# Altium PCB 朝外差接收头.PcbDoc
Units mil, origin at the board's own origin, x right, y up, seen from the top; angles counter-clockwise.
Board outline 1173.75 x 565.83 mil, 2 copper layers (Top Layer, Bottom Layer); 42 components, 26 nets, 116 pads, 44 vias.
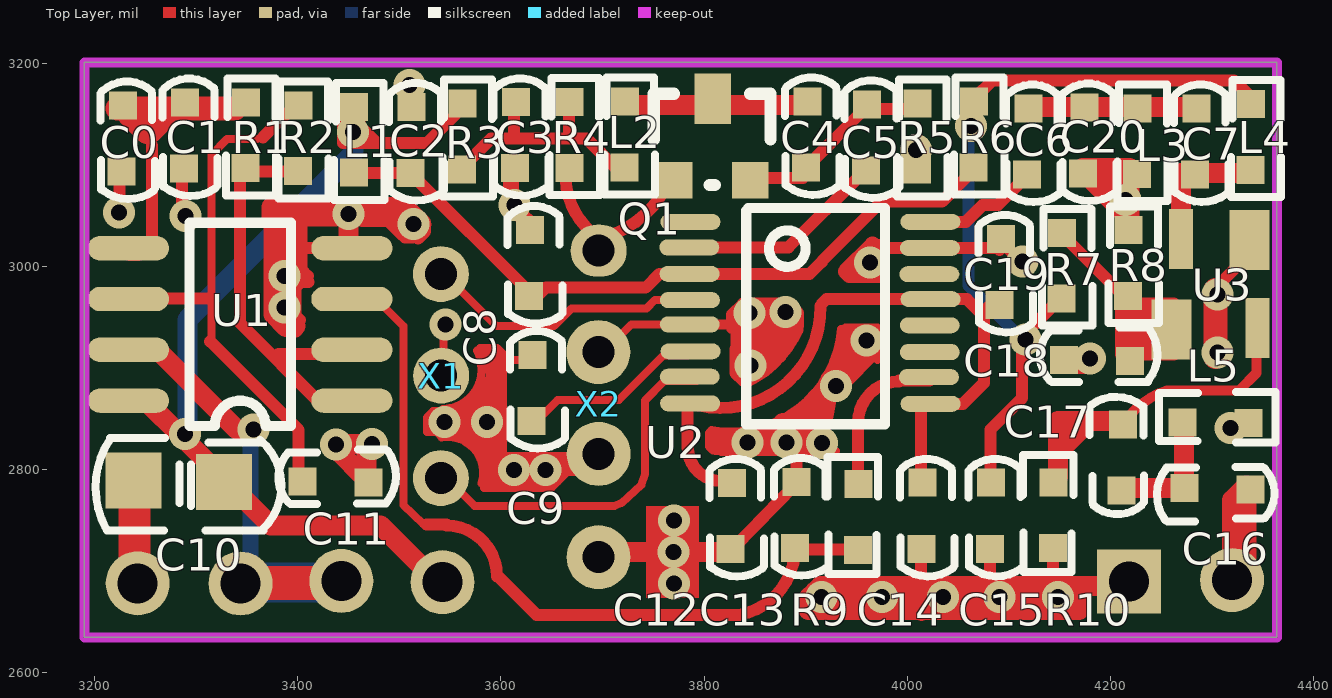
[diagram p0: Top Layer view]
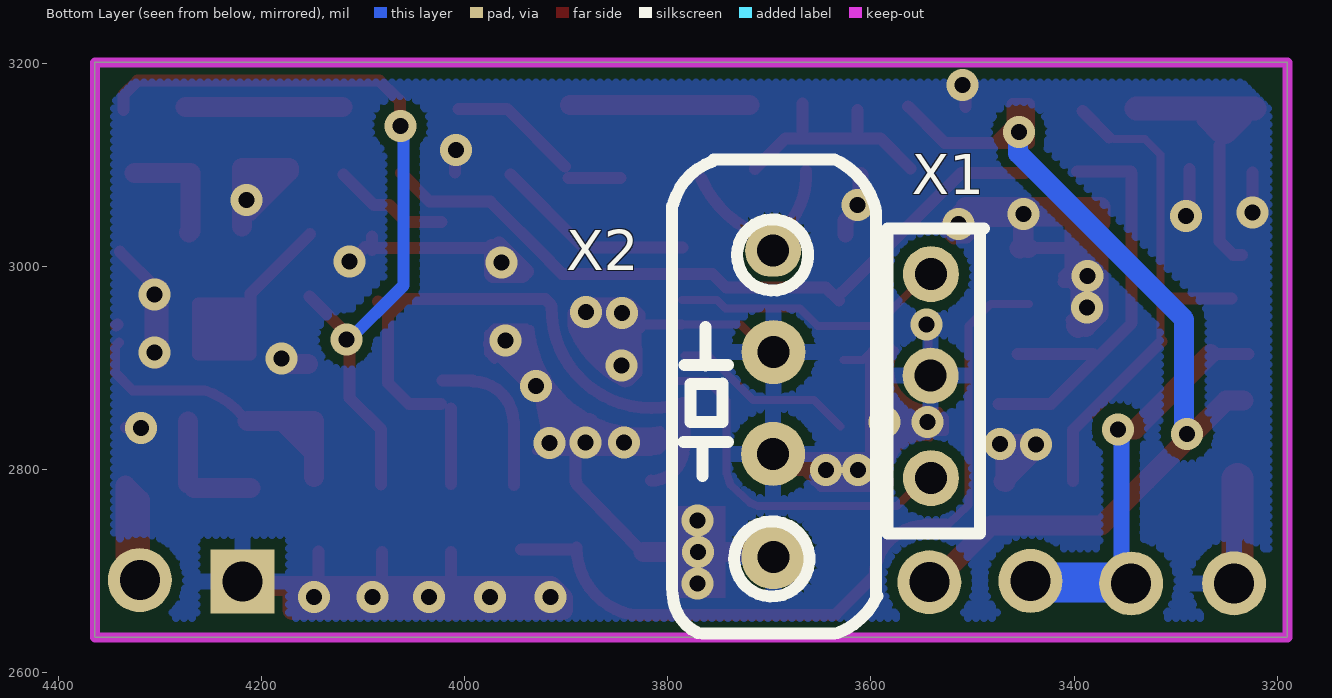
[diagram p1: Bottom Layer view, seen from below]

## Layer stack, top to bottom
Top Solder: solder mask 0.4, Solder Resist, Dk 3.5
Top Layer: signal copper 1.4
Dielectric 1: dielectric 12.6, FR-4, Dk 4.8
Bottom Layer: signal copper 1.4
Bottom Solder: solder mask 0.4, Solder Resist, Dk 3.5

## Board outline
3190,2635 3190,3200.83 4363.75,3200.83 4363.75,2635

## Design rules (kind name [scope] priority, off if disabled: settings)
Clearance [All] p1: gap=10 ignorepadtopadclearanceinfootprint=FALSE except(0: Arc-Hole Track-Hole SMDPad-Hole THPad-Hole Via-Hole Fill-Hole Poly-Hole Region-Hole Text-Hole)
PolygonConnect [All] p1: connectstyle=Relief reliefconductorwidth=10 reliefentries=4 polygonreliefangle="90 Angle" airgapwidth=10
RoutingVias [All] p1: holewidth=28 width=50 viastyle="Through Hole" minholewidth=28 minwidth=50 maxholewidth=28 maxwidth=50
SolderMaskExpansion [All] p1: expansion=4
Width [All] p1: maxlimit=200 minlimit=10 preferedwidth=10 minimp=50.000000 maximp=50.000000 favimp=50.000000
30 further rules are at their usual default settings.

## Components (designator, comment, footprint, x,y, rotation, side; value= is the part's Value field where it differs from the comment)
C0 "" C1 3232.5,3154.17 r0 top
C1 "" C1 3293.75,3157.08 r0 top
C2 "" C1 3516.67,3152.75 r0 top
C3 "" C1 3619.58,3157.5 r0 top
C4 "" C1 3906.25,3158.33 r0 top
C5 "" C1 3965,3155.42 r0 top
C6 "" C1 4123.75,3151.17 r0 top
C7 "" C1 4289.17,3151.42 r0 top
C8 "" C1 3633.33,3031.67 r0 top
C9 "" C1 3635.83,2908.75 r0 top
C10 "" C0805 3250.83,2795.25 r0 top
C11 "" C1 3408.75,2792.92 r90 top
C12 "" C1 3831.88,2782.71 r0 top
C13 "" C1 3895.42,2783.75 r0 top
C14 "" C1 4019.58,2782.92 r0 top
C15 "" C1 4087.08,2782.92 r0 top
C16 "" C1 4333.54,2776.04 r270 top
C17 "" C1 4206.25,2783.75 r180 top
C18 "" C1 4158.33,2912.71 r90 top
C19 "" C1 4096.67,3023 r0 top
C20 "" C1 4178.75,3152.17 r0 top
L1 "" R0603 3458.75,3156.83 r0 top
L2 "" R0603 3725,3162.08 r0 top
L3 "" R0603 4229.58,3155.42 r0 top
L4 "" R0603 4341.25,3159.58 r0 top
L5 "" R0603 4271.25,2849.58 r90 top
Q1 "" SOT-23 3770.42,3085 r0 top
R1 "" R0603 3352.08,3161.25 r0 top
R2 "" R0603 3403.75,3158.33 r0 top
R3 "" R0603 3565.42,3160 r0 top
R4 "" R0603 3670.83,3161.67 r0 top
R5 "" R0603 4012.92,3160 r0 top
R6 "" R0603 4068.75,3162.08 r0 top
R7 "" R0603 4155.42,3032.92 r0 top
R8 "" R0603 4220.83,3035.42 r0 top
R9 "" R0603 3948.33,2721.25 r180 top
R10 "" R0603 4140.42,2722.92 r180 top
U1 "" SO-8 3453.33,2867.92 r180 top
U2 "" U0 3787.92,3041.25 r0 top
U3 "" U2 4337.5,3017.5 r0 top
X1 "" X0 3544.17,2988.75 r0 top
X2 "" X2 3701.67,3008.75 r0 top

## Footprints (in the part's own frame and the unit in brackets; to place one, negate y for a bottom-side part, rotate by r counter-clockwise, add the part's x,y. Pads: shape width x height; smd on the part's side, far side on the other; paste and mask are expansions set on the pad)
C1 [mm]
  rect 0.7x0.7 smd: 1(-0.148,-1.545) 2(-0.116,0.106)
  silkscreen extent -0.68,-2.23 0.69,0.7
C0805 [mm]
  rect 1.4x1.4 smd: 4(-0.323,-0.153) 5(1.947,-0.185)
  silkscreen extent -1.26,-1.4 3.38,0.91
R0603 [mm]
  rect 0.7x0.7 smd: 1(-0.079,0.005) 2(-0.09,-1.64)
  silkscreen extent -0.58,-2.32 0.68,0.6
SO-8 [mil]
  oval 80x24 smd: 1(0,0) 2(0,-50) 3(0,-100) 4(0,-150) 5(220,-150) 6(220,-100) 7(220,-50) 8(220,0)
  silkscreen extent 60,-175 160,25
SOT-23 [mil]
  rect 36x36 smd: 1(0,0) 2(75,0)
  rect 36x50 smd: 3(38,80)
  silkscreen extent -20,-5 95,85
U0 [mm]
  oval 1.5x0.4 smd: 1(-0.037,0.064) 2(-0.064,-0.572) 3(-0.058,-1.233) 4(-0.048,-1.889) 5(-0.053,-2.498) 6(-0.032,-3.17) 7(-0.053,-3.805) 8(-0.042,-4.471) 9(5.969,-4.482) 10(5.927,-3.815) 11(5.948,-3.191) 12(5.948,-2.519) 13(5.969,-1.868) 14(5.937,-1.244) 15(5.953,-0.587) 16(5.964,0.069)
  silkscreen extent 1.36,-5 4.83,0.41
U2 [mm]
  rect 1x1.5 smd: 7(-1.968,-2.021) 7(-0.021,0.212)
  rect 0.6x1.5 smd: 8(-1.725,0.243) 9(0.18,-1.99)
X0 [mm]
  round 1.4 hole 0.8: 9(-0.085,0.095) 10(-0.074,-2.445) 11(-0.085,-5.006)
X2 [mm]
  round 1.6 hole 0.8: 8(-0.143,-7.493) 9(-0.138,-4.911) 10(-0.148,-2.365)
  oval 1.4x1.3 hole 0.8: 11(-0.138,0.169)

## Free pads (board coordinates)
  rect 62.99x62.99 hole 39.37: 1(4218.33,2690)
  round 62.99 hole 39.37: 2(4319.58,2691.25) 3(3542.5,2689.17) 4(3442.92,2690.42) 5(3343.75,2687.92) 6(3242.5,2688.12)

## Via types
v1: diameter 31.5, hole 15.75, Top Layer to Bottom Layer, 44 vias

## Nets (pads, with @x,y where several pads share a name; then routed paths per layer and width w, separated by ;. In a path a pad name is that pad's centre, name@x,y a point inside that pad or via, vN(x,y) a via of type N, cw(c..) or ccw(c..) an arc to the next point about the centre after c; other vN are vias at no path point)
GND: C0.1 C1.1 C2.2 C3.1 C8.2 C9.2 C10.4 C11.1 C12.1 C13.2 C14.1 C15.1 C18.2 C19.2 C20.1 L3.2 L5.2 pad.1 pad.6 R5.2 R8.1 R10.1 U1.4 U2.5 U2.15 U3.7@4336.67,3025.83 X1.10 X2.8 X2.9 X2.10 | length 5957
  Top Layer w7.87: v1@3540.42,2857.5 3533.12,2857.5 3527.08,2851.46 3527.08,2837.08 3537.08,2837.08 v1@3541.04,2833.12 ; v1@3541.62,2831.56 cw(c3547.59,2797.08) 3580.97,2786.54 ; v1@3543.1,2859.73 ccw(c3542,2898.71) 3576.43,2917.04 ; X1.10@3543.33,2896.67 v1@3543.33,2943.54 ; 3579.58,2919.79 3596.04,2919.79 3607.92,2907.92 C9.2@3626.88,2907.92 ; 3583.12,2782.08 3649.79,2782.08 3655.73,2788.02 3665.21,2797.5 X2.9@3682.92,2797.5 ; 3601.88,2912.71 3601.88,2813.54 X2.9@3681.88,2813.54 ; X2.10@3706.25,2920.83 3728.33,2942.92 U2.5 ; 3806.25,2837.71 3804.58,2836.04 3804.58,2822.71 3808.54,2818.75 ; 3807.19,2838.95 ccw(c3825.17,2947.47) 3934.79,2938.39 ; 3811.25,2818.33 3884.5,2818.33 3889.58,2818.33 v1@3929.58,2818.33 ; 3939.17,2940 3970.42,2940 3976.67,2933.75 3976.67,2914.17 3970.42,2907.92
  Top Layer w10: 3374.17,3028.04 3374.17,3030 ; v1(3386.88,2990.42) 3386.88,3010.62 3389.79,3013.54 3389.79,3019.38 ; 3397.29,3035.42 3389.79,3035.42 ; U2.5 3827.5,2942.92 3833.54,2942.92 3830.83,2940.21 3830.83,2937.5 3830.83,2936.88 3830.83,2920.51 3831.84,2919.51 ; 3841.08,2926.63 3838.96,2926.63 3831.84,2919.51 ; v1(3845.42,2902.71) v1@3845.42,2905.92 ; 3374.17,3030 3376.13,3031.96 3377.29,3033.12 3387.08,3033.12 3389.38,3035.42 ; 3374.17,3030 3376.13,3028.04 ; 3374.17,3030 3374.17,3039.17 ; 3374.17,3039.17 3376.13,3037.21 3377.92,3035.42 3389.38,3035.42 ; 3374.17,3039.17 3376.13,3039.17 3389.79,3039.17 ; 3374.17,3039.17 3374.17,3043.96 3382.92,3043.96 3389.79,3050.83 3389.79,3039.17 ; 3376.13,3028.04 3384.79,3019.38 3389.79,3019.38 ; 3376.13,3028.04 3389.15,3028.04 3389.79,3028.69 ; 3389.38,3035.42 3389.79,3035.42 ; 3389.38,3035.42 3389.79,3035.83 ; 3389.79,3019.38 3389.79,3028.69 ; 3389.79,3028.69 3389.79,3035.42 ; 3389.79,3035.42 3389.79,3035.83 ; 3389.79,3035.83 3389.79,3039.17 ; 3831.84,2919.51 3831.08,2918.75 3832.59,2918.75 ; 3831.84,2919.51 3832.59,2918.75 ; 3832.59,2918.75 3844.38,2918.75 3845.42,2917.71 3845.42,2915.62 v1@3845.42,2905.92 ; 3832.59,2918.75 3840.57,2910.77 v1@3845.42,2905.92
  Top Layer w11.81: v1@3224.58,3047.5 C0.1@3224.58,3092.5 ; v1@3286.25,3048.33 C1.1@3286.25,3095.83 ; v1@3389.79,2953.12 3389.79,3013.54 ; v1@3397.29,2989.17 3397.29,3035.42 3397.29,3051.88 ; 3397.92,3045.42 3403.75,3045.42 ; 3402.29,2947.08 3397.71,2951.67 3397.71,2978.96 3403.54,2984.79 3410.42,2984.79 ; 3402.92,3046.46 3403.75,3046.46 ; 3407.5,3017.92 U1.4@3445.6,3017.92 ; 3410,2990.42 3403.75,2996.67 3403.75,3045.42 ; v1@3437.5,3045.42 3403.75,3045.42 ; v1@3453.12,3046.46 3450,3046.46 3403.75,3046.46 ; v1@3463.12,3044.58 3489.37,3044.58 ; v1@3502.92,3044.58 3489.37,3044.58 ; v1@3503.12,3046.88 v1@3514.38,3035.62 ; C2.2@3506.67,3156.67 v1@3506.67,3182.92 ; 3508.75,3057.92 v1@3525.21,3041.46 ; 3510.21,3058.96 3525.21,3043.96 v1@3525.21,3041.46 ; v1@3518.33,3027.5 3525.21,3034.38 v1@3525.21,3040.62 ; 3811.67,2823.12 3811.67,2832.71 ; 3827.5,2939.17 3827.5,2942.92 3827.5,2952.5 3838.33,2963.33 3883.33,2963.33 3885.94,2960.73 3892.5,2954.17 3892.5,2941.25 ; C12.1@3829.58,2723.75 3889.88,2785.68 C13.2@3889.55,2787.7 ; 3830,2937.71 3830.21,2937.5 ; 3830.83,2918.75 3830.83,2895 3838.33,2887.5 ; v1@3834.79,2945.62 v1@3884.79,2945.62 ; v1@3836.04,2952.08 v1@3883.33,2952.08 ; v1@3837.5,2907.71 3840.57,2910.77 3845.42,2915.62 3854.38,2924.58 ; v1@3838.75,2895.83 3845.52,2902.6 v1@3885.83,2942.92 ; 3841.88,2937.08 3854.38,2924.58 ; 3841.97,2886.48 ccw(c3796.99,2980.26) 3891.85,2937.61 ; 3847.71,2920 3841.08,2926.63 3830.83,2936.88 3830.21,2937.5 ; v1@3849.17,2895.83 3879.17,2925.83 ; 3854.58,2924.38 3854.38,2924.58 ; 3857.08,2937.5 3830.83,2937.5 3830.21,2937.5 ; 3869.17,2939.38 3854.38,2924.58 ; v1(3881.04,2826.88) v1@3883.49,2824.42 ; v1@3884.5,2818.33 v1@3883.49,2824.42 ; C13.2 3890.83,2817.08 3889.58,2818.33 v1@3883.49,2824.42 ; v1@3960.42,2929.17 3959.05,2927.25 3927.73,2883.41 3927.08,2882.5 3916.44,2826.01 3916.25,2825 3916.19,2825 v1@3883.09,2826.9 ; v1@3971.25,3013.33 v1@3972.71,3013.33 ; 3972.71,3018.96 3973.75,3017.92 4090.83,3017.92 C19.2@4090.83,3016.25 ; R5.2@4009.17,3092.5 v1@4009.17,3118.33 ; 4013.33,2685.42 C14.1@4013.33,2718.75 ; 4014.17,2657.08 4014.17,2661.67 4014.17,2674.58 4014.17,2685.42 ; v1@4080,2670.42 4080,2674.58 v1@4080,2685.42 ; v1@4081.25,2685.42 C15.1@4081.25,2718.75 ; C19.2@4090.83,3029.58 4090.83,3018.96 4097.71,3018.96 v1@4115.83,3000.83 ; v1@4140,2662.92 4140,2674.58 v1@4140,2685.42 ; v1@4143.54,2685.42 R10.1@4143.54,2719.58 ; v1@4301.67,2977.08 U3.7@4339.17,3014.58 ; v1@4314.17,2841.25 L5.2@4333.33,2841.25 ; 3403.75,3045.42 3403.75,3046.46 ; 3489.37,3044.58 3503.02,3030.94 3505.42,3028.54 3513.12,3028.54 v1@3525.21,3040.62 ; v1@3525.21,3040.62 v1@3525.21,3041.46 ; v1@3525.21,3040.62 3525.62,3041.04 v1@3525.21,3041.46 ; v1@3883.09,2826.9 3881.05,2827.01 3843.33,2829.17 3881.08,2827.98 3882.92,2827.92 3883.03,2827.2 v1@3883.09,2826.9 ; v1@3883.09,2826.9 v1@3883.49,2824.42
  Top Layer w15.75: C3.1@3610,3090 3610,3060 3625,3045 C8.2@3625,3031.25 ; v1@3952.29,2998.33 3960.62,3006.67 v1@3967.5,3013.54 ; v1@3962.71,2995.62 v1@3966.67,2999.58 ; 3965.83,3021.46 3939.58,2995.21 3943.3,2991.49 3971.9,2991.49 3972.71,2992.29 v1@3972.71,3013.33 ; 3970.21,3018.96 3972.71,3018.96
  Top Layer w19.68: 3388.33,2940.42 3376.13,2952.62 3376.13,3028.04 3376.13,3031.96 3376.13,3037.21 3376.13,3039.17 3376.13,3042 3374.17,3043.96 3374.17,3058.33 3507.08,3058.33 ; 3396.25,2939.58 3397.92,2941.25 ; v1@3435,2825.42 3467.5,2825.42 C11.1@3467.5,2790.42 ; v1@3437.08,2820.83 C11.1@3467.5,2790.42 ; U1.4@3445,3018.12 U1.4@3445.6,3017.92 ; v1@3456.62,3049.19 3457.67,3052 v1@3457.5,3055.83 ; C11.1@3467.5,2787.92 C11.1@3467.5,2790.42 ; C11.1@3469.58,2788.33 C11.1@3467.5,2790.42 ; v1@3537.29,2847.5 v1@3575.62,2847.5 ; v1@3543.33,2841.67 3565.62,2841.67 ; 3560,2857.08 v1@3575.62,2857.08 ; 3575.62,2831.46 v1@3575.62,2847.5 ; 3575.62,2868.54 v1@3575.62,2857.08 ; v1@3578.75,2857.08 v1@3575.62,2857.08 ; v1@3580.21,2847.5 v1@3575.62,2847.5 ; 3585,2815.83 3585,2881.25 ; 3585.83,2909.38 3585.83,2913.75 ; 3591.25,2792.71 v1@3650.62,2792.71 ; 3594.79,2912.92 3594.79,2805 X2.9@3671.46,2805 ; X2.8@3704.17,2718.75 v1(3770,2718.75) C12.1@3823.75,2718.75 ; v1@3855,2833.33 v1@3893.75,2833.33 ; 3877.5,2845.83 3896.25,2845.83 ; 3892.71,2849.17 3916.67,2873.12 ; v1@3923.96,2888.33 3944.58,2908.96 ; v1@3925.83,2674.58 v1(3975,2674.58) 4014.17,2674.58 v1(4035,2674.58) 4080,2674.58 v1(4090.62,2674.58) 4140,2674.58 v1(4148.12,2674.58) 4165.83,2674.58 ; v1@3928.54,2880.42 v1@3971.67,2923.54 ; 3939.38,2911.67 3939.38,2922.29 ; 3941.67,2931.46 v1@3966.88,2931.46 ; 3945.62,2917.29 v1@3953.54,2925.21 ; C18.2@4154.17,2904.17 v1@4175,2904.17 ; 4169.17,2676.67 4169.17,2661.67 4014.17,2661.67 3902.92,2661.67 3902.92,2673.75 3908.75,2679.58 3909.58,2680.42 3914.58,2685.42 4014.17,2685.42 4080,2685.42 4140,2685.42 pad.1@4210,2685.42 ; C20.1@4172.5,3096.67 4218.75,3096.67 R8.1@4218.75,3039.17 ; C20.1@4172.92,3093.33 v1@4212.08,3054.17 ; 4197.92,3087.5 v1@4211.25,3074.17 ; v1@3575.62,2847.5 v1@3575.62,2857.08
  Top Layer w20: v1(3450,3051.67) 3450,3046.46 3450,3021.25 U1.4
  Top Layer w23.62: v1@4303.33,2910.83 v1@4303.33,2976.67
  Top Layer w31.5: pad.6@3239.17,2697.08 C10.4@3239.17,2790.83
  other v1: 3915.42,2674.58 3770.42,2688.12 3770.42,2750 3612.71,2799.79 3643.96,2799.79 3437.71,2824.79 3473.12,2825.21 3916.25,2826.04 3842.92,2826.67 4318.12,2841.04 3544.38,2846.67 3586.46,2846.88 3929.58,2882.08 4180,2909.38 4305.21,2915.42 3959.58,2926.88 3545.42,2942.92 3844.79,2954.17 3880.21,2955 3387.08,2959.38 4305.21,2972.29 3963.33,3003.96 4113.33,3005 3513.75,3041.67 3289.58,3049.58 3224.17,3052.92 3613.33,3060.42 4214.58,3065.42 4008.33,3114.38 3509.79,3178.54
NewNet1: C10.5 L1.1 pad.3 R3.1 U1.8 | length 1007.3
  Top Layer w11.81: v1@3453.75,3127.5 L1.1@3453.75,3151.67 ; v1@3460.83,3125.83 3460.83,3160 3444.58,3160 3444.58,3157.04 3444.58,3121.67 3527.5,3121.67 R3.1@3563.33,3157.5 ; v1@3461.67,3137.92 3475,3124.58
  Top Layer w19.68: U1.8 3250.42,2867.92 3286.04,2832.29 3328.94,2789.4 3373.33,2745 3481.67,2745 pad.3@3534.17,2692.5
  Bottom Layer w19.68: v1@3291.67,2833.75 3291.67,2947.92 3455,3111.25 v1@3455,3134.58
  other v1: 3288.96,2835.21 3454.17,3132.5
NewNet2: pad.4 pad.5 U1.7 | length 590.7
  Top Layer w11.81: U1.7@3228.33,2913.75 U1.7@3265.83,2913.75
  Top Layer w19.68: U1.7@3265.83,2913.75 3340,2839.58 v1(3356.67,2839.58)
  Top Layer w27.56: pad.5@3342.08,2685.42 pad.4@3441.67,2685.42
  Top Layer w31.5: pad.5@3344.58,2689.58 pad.4@3438.75,2689.58
  Bottom Layer w15.75: pad.5@3353.33,2690.42 v1@3353.33,2835.83
  Bottom Layer w39.37: pad.5@3343.75,2688.75 pad.4@3436.25,2688.75
NewNet3: C11.2 R2.1 U1.6 | length 511.1
  Top Layer w7.87: 3315,2928.33 3315,3110 3330.42,3125.42 3333.96,3125.42 ; 3335.21,3125.62 3360,3125.62
  Top Layer w11.81: U1.6@3245,2968.33 3314.17,2968.33 ; 3313.75,2926.25 3400.83,2839.17 C11.2@3400.83,2788.75 ; 3365.83,3127.08 R2.1@3391.67,3152.92
NewNet4: C0.2 C1.2 R1.1 U1.5 | length 281.6
  Top Layer w11.81: U1.5@3234.58,3011.25 3243.33,3011.25 3256.67,3024.58 3256.67,3119.17
  Top Layer w23.62: C0.2@3222.5,3155.42 R1.1@3338.33,3155.42 ; C0.2@3235,3148.75 3251.67,3132.08 ; 3254.17,3132.08 3268.33,3146.25
NewNet6: C13.1 R9.1 U1.3 | length 767.4
  Top Layer w7.87: U1.3@3444.58,2962.92 3482.29,2962.92 3503.96,2941.25 3503.96,2765.21 3523.54,2746.67
  Top Layer w11.81: 3526.67,2745.83 3546.25,2745.83 ; 3546.25,2745 cw(c3546.25,2695) 3596.25,2695 ; 3597.08,2695 3635,2657.08 3834.86,2657.08 ccw(c3822.12,2723.33) C13.1@3889.58,2723.33 ; C13.1@3893.33,2721.25 R9.1@3944.58,2721.25
NewNet7: R1.2 R2.2 U1.1 U1.2 | length 439.6
  Top Layer w11.81: R1.2@3343.33,3092.08 3343.33,2944.17 3422.92,2864.58 U1.1@3474.17,2864.58 ; R1.2@3343.75,3093.33 R2.2@3397.08,3093.33 ; 3381.25,2913.75 U1.2@3455.83,2913.75
NewNet8: Q1.1 R4.2 X2.11 | length 166
  Top Layer w11.81: R4.2@3663.9,3093.74 ccw(c3736.74,3088.84) X2.11@3696.33,3028.04 ; X2.11@3703.08,3028.69 ccw(c3670.03,3129.4) Q1.1@3767.17,3086.99
NewNet9: C4.1 C5.2 Q1.2 R5.1 | length 179.3
  Top Layer w11.81: Q1.2@3846.25,3087.08 C4.1@3897.5,3087.08 ; C4.1@3901.25,3098.33 3957.92,3155 R5.1@4005.83,3155
NewNet10: C4.2 L2.1 Q1.3 | length 176.7
  Top Layer w19.68: L2.1@3719.58,3158.75 C4.2@3896.25,3158.75
NewNet11: C5.1 U2.2 | length 198.9
  Top Layer w11.81: U2.2 3882.92,3018.75 C5.1@3954.58,3090.42
NewNet12: C2.1 C8.1 L1.2 R6.2 U2.3 | length 712.9
  Top Layer w11.81: L1.2@3448.33,3092.08 3510.83,3092.08 3510.92,3092 C8.1@3628.75,2974.17 ; C8.1@3631.25,2966.25 3644.17,2979.17 3742.5,2979.17 3756.04,2992.71 U2.3 3903.96,2992.71 3915.8,3004.55 3915.8,3005.06 3974.5,3063.75 4034.17,3063.75 R6.2@4062.5,3092.08
NewNet13: U2.4 X1.9 | length 276.1
  Top Layer w7.87: X1.9@3542.5,2994.17 3595.42,2941.25 3652.29,2941.25 3669.6,2958.56 3743.14,2958.56 3751.46,2966.88 U2.4
NewNet14: C9.1 U2.6 | length 182.5
  Top Layer w7.87: C9.1@3629.79,2842.5 3655.83,2868.54 3716.04,2868.54 3760,2912.5 U2.6@3783.33,2912.5
NewNet15: U2.7 X1.11 | length 363.3
  Top Layer w7.87: X1.11@3539.17,2799.17 3574.17,2764.17 3711.67,2764.17 3718.75,2767.29 3738.12,2784.79 3741.88,2796.25 3741.88,2868.12 3760.83,2887.08 U2.7@3792.5,2887.08
NewNet16: C12.2 C14.2 C19.1 U2.8 U2.9 U2.13 | length 658.7
  Top Layer w11.81: 3783.54,2821.04 U2.8@3783.54,2859.79 ; 3784.25,2821.04 ccw(c3816.25,2821.04) C12.2@3816.25,2789.04 ; U2.8@3785.09,2865.67 ccw(c3816.34,2958.56) 3914.31,2960.83 ; 3915.83,2963.33 3920.21,2967.71 U2.13 4058.54,2967.71 4071.25,2955 ; C14.2@4013.33,2786.04 U2.9@4013.33,2860.21 ; U2.9 4054.79,2864.79 4075.42,2885.42 4075.42,2955.83 C19.1@4085,2965.42
NewNet17: R9.2 U2.10 | length 154.1
  Top Layer w11.81: R9.2@3951.25,2785 3951.25,2846.25 ; 3951.67,2846.67 cw(c3991.67,2846.67) 3991.67,2886.67 ; 3991.67,2887.5 U2.10@4021.67,2887.5
NewNet18: C6.1 U2.16 | length 115.7
  Top Layer w11.81: U2.16 4057.71,3043.96 4074.17,3060.42 4089.17,3060.42 C6.1@4119.17,3090.42
NewNet19: C3.2 L2.2 R3.2 R4.1 | length 235.1
  Top Layer w11.81: R3.2@3560.83,3096.25 3590.42,3125.83 3684.17,3125.83 L2.2@3714.17,3095.83 ; 3612.92,3126.67 C3.2@3612.92,3153.75 ; 3667.08,3130.42 R4.1@3667.08,3160.42
NewNet20: C6.2 C7.2 C20.2 L3.1 | length 154.6
  Top Layer w19.68: C6.2@4120,3156.67 C7.2@4274.58,3156.67
NewNet21: C7.1 L4.2 U3.8 | length 114.1
  Top Layer w19.68: U3.8@4271.04,3033.54 4269.58,3035 4269.58,3092.08 L4.2@4324.58,3092.08
NewNet22: C18.1 R7.1 R8.2 U3.7@4260,2937.92 | length 294.2
  Top Layer w11.81: R7.1@4152.08,3031.67 4210.42,2973.33 4210.42,2913.33 4262.5,2913.33 4262.5,2963.33 R8.2@4212.92,2963.33
NewNet23: C17.1 R10.2 U3.9 | length 337.9
  Top Layer w10: C17.1@4212.93,2844.58 cw(c4278.58,2804.34) 4255.84,2877.9 ; 4257.5,2877.92 4326.43,2877.92 4343.83,2895.31 4343.83,2921.17 U3.9@4340,2925
  Top Layer w11.81: U3.9@4341.67,2942.92 U3.9@4342.92,2941.66
  Top Layer w19.68: R10.2@4148.33,2792.92 4148.33,2847.92 C17.1@4213.75,2847.92 ; 4151.25,2820 4176.25,2845
NewNet24: C16.1 C17.2 L5.1 | length 116.7
  Top Layer w19.68: C17.2@4210.83,2781.67 C16.1@4266.25,2781.67 ; C16.1@4272.08,2786.25 L5.1@4272.08,2847.5
NewNet25: C16.2 pad.2 | length 195.7
  Top Layer w19.68: pad.2@4315,2695 pad.2@4319.58,2699.58 ; pad.2 pad.2@4319.58,2699.58 ; pad.2@4319.58,2699.58 4333.75,2713.75 4333.75,2784.17 4319.58,2770 pad.2@4319.58,2699.58
NewNet26: C15.2 L4.1 R6.1 R7.2 | length 770.4
  Top Layer w11.81: v1@4063.33,3142.5 R6.1@4063.33,3163.33 ; R6.1@4067.08,3166.25 4083.75,3182.92 4321.67,3182.92 4335.83,3168.75 L4.1@4335.83,3154.17 ; C15.2@4082.08,2785.42 4082.08,2839.58 4112.92,2870.42 4112.92,2930.83 R7.2@4152.5,2970.42
  Bottom Layer w11.81: v1@4060,3140.42 4060,2981.25 v1@4116.67,2924.58
  other v1: 4116.25,2927.92 4062.92,3138.12
pads on no net: U2.1 U2.11 U2.12 U2.14

## Polygon pours and split planes (outlines as drawn)
GND on Bottom Layer "BottomLayer-No Net" (hatched 90Degree grid 7.87 track 7.87, remove dead copper, pour order 0): 4335,2646.25 4035,2646.25 3225,2646.25 3210,2661.25 3205,2666.25 3205,2711.25 3205,3151.25 3220,3166.25 3235,3181.25 3325,3181.25 4325,3181.25 4340,3166.25 4345,3161.25 4345,3131.25 4345,2656.25 4335,2646.25

## Keep-outs
Keep-Out Layer:
  the board outline again, w9.84

## Other copper
Top Layer:
  rectangle net NewNet22: 4215.42,2912.08 4263.33,2961.67
  rectangle net GND: 3742.92,2673.75 3795,2764.17
  rectangle net GND: 3815,2813.33 3926.67,2834.58
  rectangle net GND: 3884.58,2824.17 3918.75,2855
  rectangle net GND: 3907.08,2852.92 3920.42,2872.92